# Altium PCB PCB1.PcbDoc
Units mil, origin at the board's own origin, x right, y up, seen from the top; angles counter-clockwise.
Board outline 1725 x 2475 mil, 2 copper layers (Top Layer, Bottom Layer); 17 components, 8 nets, 72 pads, 0 vias.
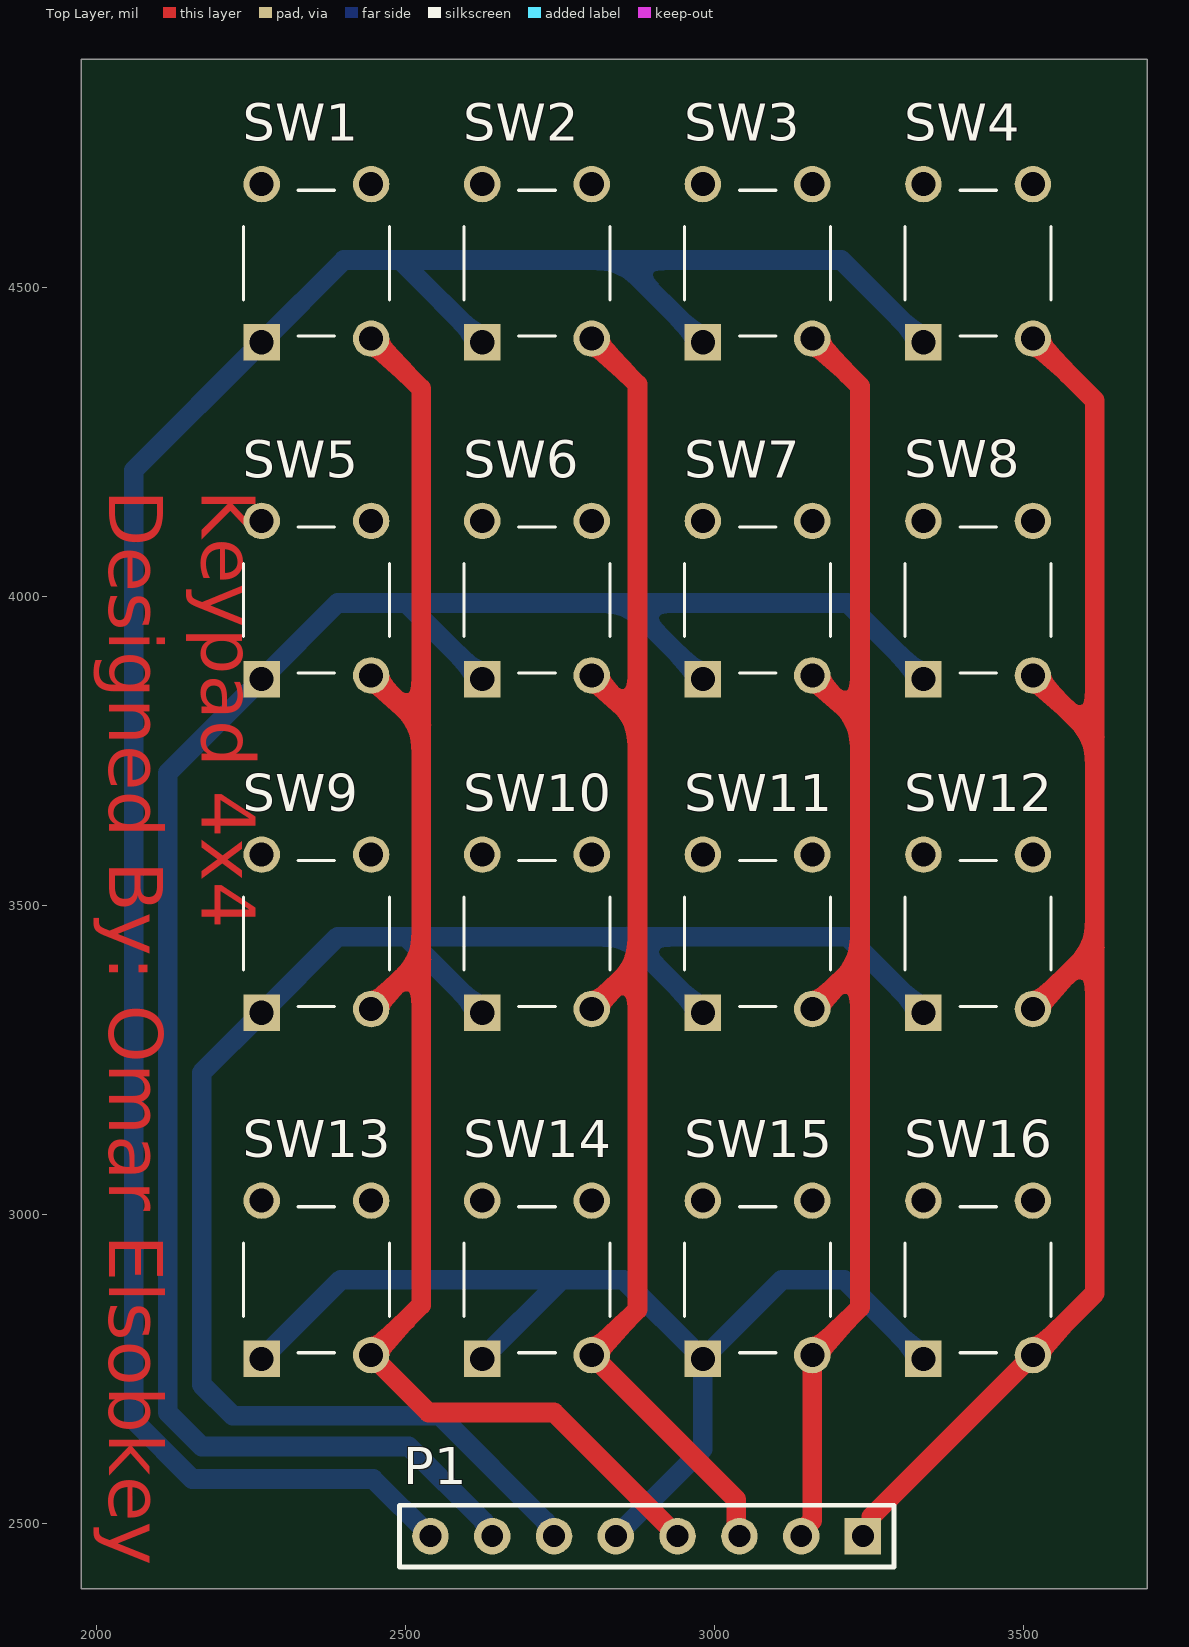
[diagram p0: Top Layer view]
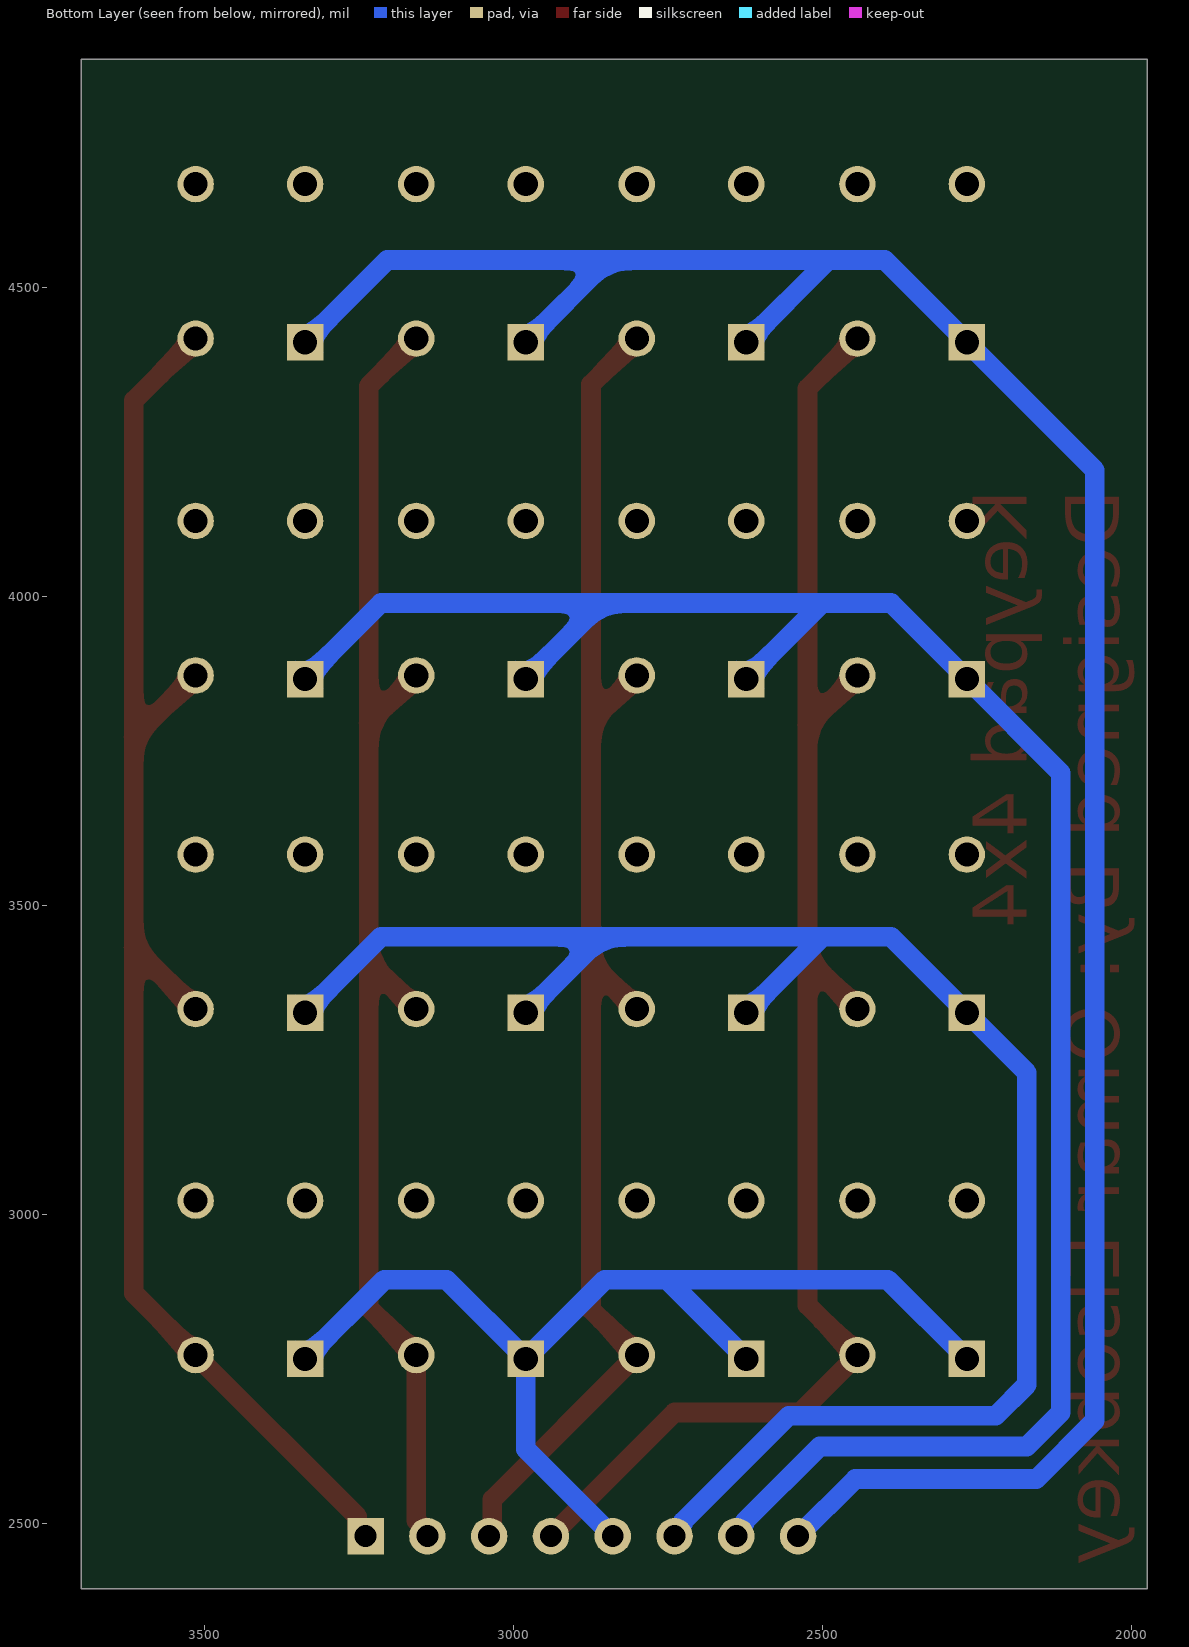
[diagram p1: Bottom Layer view, seen from below]
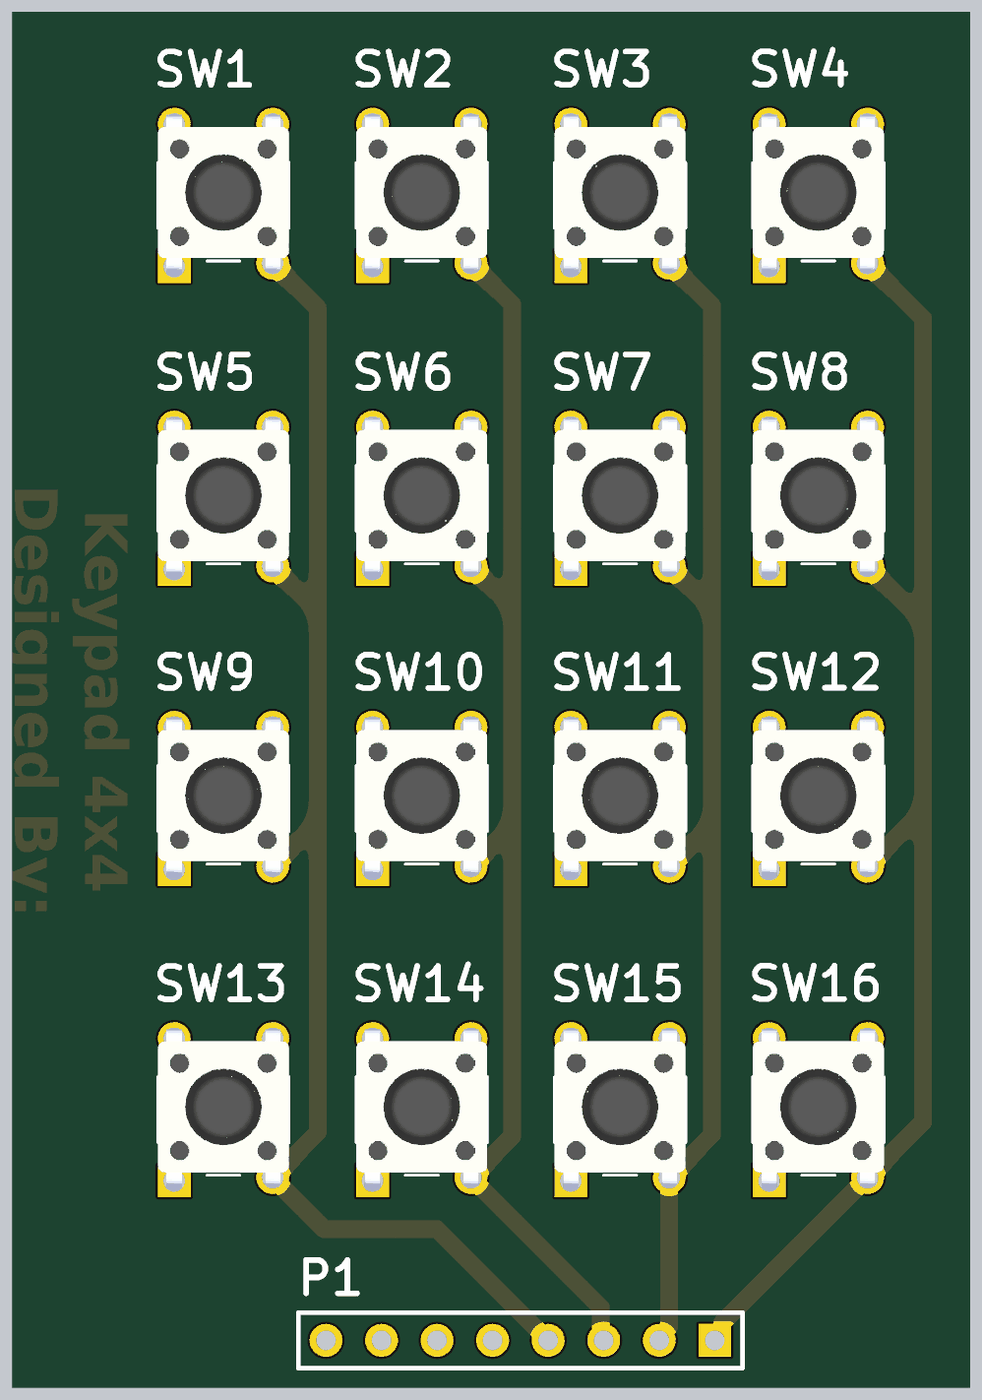
[diagram p2: 3D render of the assembled board from above, using the file's embedded part models]

## Layer stack, top to bottom
Top Solder: solder mask 0.4, Solder Resist, Dk 3.5
Top Layer: signal copper 1.4
Dielectric 1: dielectric 12.6, FR-4, Dk 4.8
Bottom Layer: signal copper 1.4
Bottom Solder: solder mask 0.4, Solder Resist, Dk 3.5

## Board outline
1975,2395 3700,2395 3700,4870 1975,4870

## Design rules (kind name [scope] priority, off if disabled: settings)
Clearance T_GND [InNamedPolygon('T_GND')] p1: gap=16 ignorepadtopadclearanceinfootprint=FALSE
Clearance B_GND [InNamedPolygon('B_GND')] p2: gap=16 ignorepadtopadclearanceinfootprint=FALSE
Clearance [All] p3: gap=16 ignorepadtopadclearanceinfootprint=FALSE
PolygonConnect [All] p1: connectstyle=Relief reliefconductorwidth=10 reliefentries=4 polygonreliefangle="90 Angle" airgapwidth=10
RoutingVias [All] p1: holewidth=28 width=50 viastyle="Through Hole" minholewidth=28 minwidth=50 maxholewidth=28 maxwidth=50
SolderMaskExpansion [All] p1: expansion=4 istentingtop=FALSE
UnRoutedNet [All] p1: checkbadconnections=TRUE
Width [All] p1: maxlimit=32 minlimit=32 preferedwidth=32
29 further rules are at their usual default settings.

## Classes and differential pairs
component class Sheet1: SW1 SW2 SW3 SW4 SW5 SW6 SW7 SW8 SW9 SW10 SW11 SW12 SW13 SW14 SW15 SW16

## Components (designator, comment, footprint, x,y, rotation, side; value= is the part's Value field where it differs from the comment)
P1 "Header 8" HDR1X8 3240,2480 r180 top
SW1 "3-1825910-1" TE_3-1825910-1 2355.51,4540 r90 top
SW2 "3-1825910-1" TE_3-1825910-1 2712.46,4540 r90 top
SW3 "3-1825910-1" TE_3-1825910-1 3069.4,4540 r90 top
SW4 "3-1825910-1" TE_3-1825910-1 3426.34,4540 r90 top
SW5 "3-1825910-1" TE_3-1825910-1 2355.51,3995 r90 top
SW6 "3-1825910-1" TE_3-1825910-1 2712.46,3995 r90 top
SW7 "3-1825910-1" TE_3-1825910-1 3069.4,3995 r90 top
SW8 "3-1825910-1" TE_3-1825910-1 3426.34,3995 r90 top
SW9 "3-1825910-1" TE_3-1825910-1 2355.51,3455 r90 top
SW10 "3-1825910-1" TE_3-1825910-1 2712.46,3455 r90 top
SW11 "3-1825910-1" TE_3-1825910-1 3069.4,3455 r90 top
SW12 "3-1825910-1" TE_3-1825910-1 3426.34,3455 r90 top
SW13 "3-1825910-1" TE_3-1825910-1 2355.51,2895 r90 top
SW14 "3-1825910-1" TE_3-1825910-1 2712.46,2895 r90 top
SW15 "3-1825910-1" TE_3-1825910-1 3069.4,2895 r90 top
SW16 "3-1825910-1" TE_3-1825910-1 3426.34,2895 r90 top

## Footprints (in the part's own frame and the unit in brackets; to place one, negate y for a bottom-side part, rotate by r counter-clockwise, add the part's x,y. Pads: shape width x height; smd on the part's side, far side on the other; paste and mask are expansions set on the pad)
HDR1X8 [mm] "Connector; Header; 8 Position"
  rect 1.5x1.5 hole 0.9: 1(0,0)
  round 1.5 hole 0.9: 2(2.54,0) 3(5.08,0) 4(7.62,0) 5(10.16,0) 6(12.7,0) 7(15.24,0) 8(17.78,0)
  silkscreen extent -1.27,-1.27 19.05,1.27
TE_3-1825910-1 [mm]
  rect 1.498x1.498 hole 0.99: 1(-3.25,2.25)
  round 1.498 hole 0.99: 2(3.25,2.25) 3(-3.1,-2.25) 4(3.25,-2.25)
  silkscreen extent -3,-3 3,3, body extent -3.77,-3 4.02,3, height 17.01

## Part data
P1: "Header, 8-Pin", LatestRevisionDate=17-Jul-2002, LatestRevisionNote="Re-released for DXP Platform.", Publisher="Altium Limited"
SW1 SW2 SW3 SW4 SW5 SW6 SW7 SW8 SW9 SW10 SW11 SW12 SW13 SW14 SW15 SW16: "Switch Push Button OFF _ON_ SPST Round Button 0.05A 24VDC Momentary Contact PC Pins Thru-Hole", Package=None, Availability=Unavailable, EU_RoHS_Compliance=Compliant, MF="TE Connectivity", MP=3-1825910-1, Price=None, SnapEDA_Link=https://www.snapeda.com/parts/3-1825910-1/TE%20Connectivity%20ALCOSWITCH%20Switches/view-part/452461/?ref=snap, TE_purchase_URL=https://www.te.com/usa-en/product-3-1825910-1.html?te_bu=Cor&te_type=disp&te_campaign=seda_glo_cor-seda-global-disp-prtnr-fy19-seda-model-bom-cta_sma-317_1&elqCampaignId=32493

## Nets (pads, with @x,y where several pads share a name; then routed paths per layer and width w, separated by ;. In a path a pad name is that pad's centre, name@x,y a point inside that pad or via, vN(x,y) a via of type N, cw(c..) or ccw(c..) an arc to the next point about the centre after c; other vN are vias at no path point)
c1: P1.4 SW1.3 SW5.3 SW9.3 SW13.3 | length 2558.1
  Top Layer w32: SW9.3 2525,3413.86 ; SW5.3 2525,3792.05 ; SW1.3 2525,4337.05 2525,3792.05 ; P1.4 2740,2680 2537.05,2680 SW13.3 2525,2853.86 2525,3413.86 ; 2525,3413.86 2525,3792.05
c2: P1.3 SW2.3 SW6.3 SW10.3 SW14.3 | length 2307.4
  Top Layer w32: SW10.3 2875,3406.91 ; SW6.3 2875,3798.99 ; SW2.3 2875,4343.99 2875,3798.99 ; P1.3 3034.82,2485.18 3034.82,2539.17 SW14.3 2875,2846.91 2875,3406.91 ; 2875,3406.91 2875,3798.99
c3: P1.2 SW3.3 SW7.3 SW11.3 SW15.3 | length 2227
  Top Layer w32: P1.2 3140,2487.32 3157.98,2505.3 SW15.3 3235,2849.97 3235,3409.97 ; SW11.3 3235,3409.97 ; SW7.3 3235,3795.94 ; SW3.3 3235,4340.94 3235,3795.94 ; 3235,3409.97 3235,3795.94
c4: P1.1 SW4.3 SW8.3 SW12.3 SW16.3 | length 2417.8
  Top Layer w32: P1.1 3253.53,2493.53 3253.53,2511.55 SW16.3 3615,2873.03 3615,3433.03 ; SW12.3 3615,3433.03 ; SW8.3 3615,3772.88 ; SW4.3 3615,4317.88 3615,3772.88 ; 3615,3433.03 3615,3772.88
r1: P1.8 SW1.1 SW2.1 SW3.1 SW4.1 | length 3945.2
  Bottom Layer w32: P1.8 2447.35,2572.65 2154.47,2572.65 2060,2667.12 2060,4205.12 SW1.1 2399.88,4545 2490.92,4545 ; SW2.1 2490.92,4545 ; SW3.1 2847.86,4545 ; SW4.1 3204.81,4545 2847.86,4545 ; 2490.92,4545 2847.86,4545
r2: P1.7 SW5.1 SW6.1 SW7.1 SW8.1 | length 3384.1
  Bottom Layer w32: SW6.1 2500.92,3990 ; P1.7 2640,2487.32 2626.47,2500.85 2626.47,2503.53 2505,2625 2170,2625 2115,2680 2115,3715.12 SW5.1 2389.88,3990 2500.92,3990 ; SW7.1 2857.86,3990 ; SW8.1 3214.81,3990 2857.86,3990 ; 2500.92,3990 2857.86,3990
r3: P1.6 SW9.1 SW10.1 SW11.1 SW12.1 | length 2840
  Bottom Layer w32: SW10.1 2500.92,3450 ; P1.6 2740,2487.32 2726.47,2500.85 2726.47,2503.53 2555,2675 2220,2675 2170,2725 2170,3230.12 SW9.1 2389.88,3450 2500.92,3450 ; SW11.1 2857.86,3450 ; SW12.1 3214.81,3450 2857.86,3450 ; 2500.92,3450 2857.86,3450
r4: P1.5 SW13.1 SW14.1 SW15.1 SW16.1 | length 1809.2
  Bottom Layer w32: SW13.1 2394.88,2895 2751.83,2895 ; SW14.1 2751.83,2895 ; P1.5 2980.82,2620.82 SW15.1 ; SW16.1 3209.81,2895 3108.77,2895 SW15.1 ; 2751.83,2895 2852.86,2895 SW15.1
pads on no net: SW1.2 SW1.4 SW2.2 SW2.4 SW3.2 SW3.4 SW4.2 SW4.4 SW5.2 SW5.4 SW6.2 SW6.4 SW7.2 SW7.4 SW8.2 SW8.4 SW9.2 SW9.4 SW10.2 SW10.4 SW11.2 SW11.4 SW12.2 SW12.4 SW13.2 SW13.4 SW14.2 SW14.4 SW15.2 SW15.4 SW16.2 SW16.4

## Other copper
Top Layer:
  text "Keypad 4x4 / Designed By: Omar Elsobkey" at 1990.83,4173.23 h150 r270